# EAGLE board M_C_ext_main_ftdi (EAGLE 9.6.2)
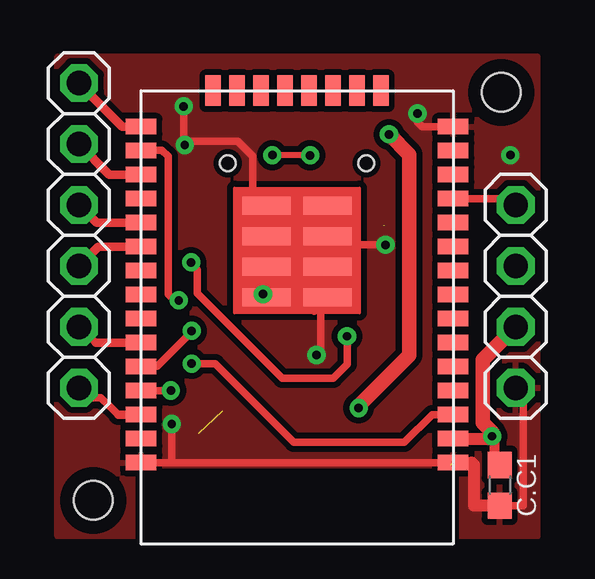
[diagram p0: board, top side]
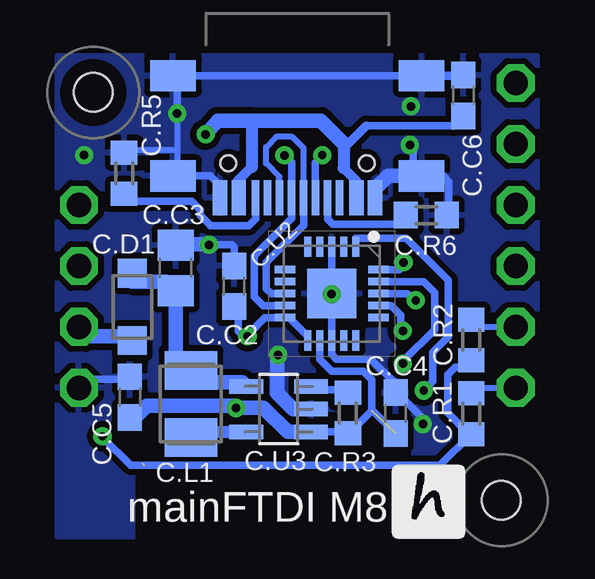
[diagram p1: board, bottom side, seen from below]

No outline drawn. Coordinates in mm, seen from the top.
Copper layers (1*16): Top 0.035mm / dielectric 1.5mm / Bottom 0.035mm
Design rules "default *": minimum track width 10mil, minimum drill 0.35mm, track to track 6mil, track to pad 6mil, pad to pad 6mil, via to via 10mil, smd to smd 10mil, copper to edge 10mil, drill to drill 40mil, minimum pad ring 10mil, minimum via ring 8mil, stop-mask expansion 4mil, vias tented up to drill 4mm, thermal gap 10mil
Holes 1.6 mm at 2,2 19,19
tRestrict: area 18,18 to 20,20; area 1,1 to 3,3
bRestrict: area 1,1 to 3,3; area 18,18 to 20,20

## Footprints (pad centres in the part's own frame; a part is rotated, then mirrored left to right if it is on the bottom)
C0603 = smd 1.1 x 1: 1 -0.85,0; 2 0.85,0
C0805 = smd 1.3 x 1.5: 1 -0.95,0; 2 0.95,0
SHOTKY_2.8 = smd 1.2 x 1.2: A -1.4,0; K 1.4,0
1X06 = drill 1.016 pad 1.575 octagon: 1 -6.35,0; 2 -3.81,0; 3 -1.27,0; 4 1.27,0; 5 3.81,0; 6 6.35,0
L3230M = smd 1.6 x 2.2: 1 -1.4,0; 2 1.4,0
R0603 = smd 1 x 1.1: 1 -0.85,0; 2 0.85,0
TTGO-MICRO-32 = smd 1.27 x 0.635: 3V3 -6.5,5; EN -6.5,4; GND1 -6.5,6; GND2 -6.5,-8; GND3 6.5,6; IO0 6.5,-7; IO2 6.5,-8; IO4 6.5,-6; IO5 6.5,-3; IO12 -6.5,-7; IO14 -6.5,-6; IO16 6.5,-5; IO17 6.5,-4; IO18 6.5,-2; IO19 6.5,-1; IO21 6.5,1; IO22 6.5,4; IO23 6.5,5; IO25 -6.5,-3; IO26 -6.5,-4; IO27 -6.5,-5; IO32 -6.5,-1; IO33 -6.5,-2; IO34 -6.5,1; IO35 -6.5,0; NC 6.5,0; RXD0 6.5,2; TXD0 6.5,3; VN -6.5,2; VP -6.5,3 | smd 0.635 x 1.27: CLK 0.5,-9.5; CMD -0.5,-9.5; IO13 -3.5,-9.5; IO15 3.5,-9.5; SD0 1.5,-9.5; SD1 2.5,-9.5; SD2 -2.5,-9.5; SD3 -1.5,-9.5 | smd 2.032 x 0.762: GND4 -1.27,-0.889; GND5 1.27,-0.889; GND6 -1.27,-2.159; GND7 1.27,-2.159; GND8 -1.27,-3.429; GND9 -1.27,-4.699; GND10 1.27,-3.429; GND11 1.27,-4.699
QFN50P400X400X80-21N = smd 0.85 x 0.3: 1 -1.95,1; 2 -1.95,0.5; 3 -1.95,0; 4 -1.95,-0.5; 5 -1.95,-1; 11 1.95,-1; 12 1.95,-0.5; 13 1.95,0; 14 1.95,0.5; 15 1.95,1 | smd 0.3 x 0.85: 6 -1,-1.95; 7 -0.5,-1.95; 8 0,-1.95; 9 0.5,-1.95; 10 1,-1.95; 16 1,1.95; 17 0.5,1.95; 18 0,1.95; 19 -0.5,1.95; 20 -1,1.95 | smd 2.05 x 2.05: 21 0,0
SOT32-5 = smd 0.6 x 1.4: BP 0.95,1.35; GND 0,-1.35; SHDN 0.95,-1.35; VIN -0.95,-1.35; VOUT -0.95,1.35
1X04 = drill 1.016 pad 1.575 octagon: 1 -3.81,0; 2 -1.27,0; 3 1.27,0; 4 3.81,0
USB-C = smd 0.6 x 1.45: A1B12 -3.235,3.825; A4B9 -2.46,3.825; B1A12 3.215,3.825; B4A9 2.44,3.825 | smd 0.3 x 1.45: A5 -1.26,3.825; A6 -0.26,3.825; A7 0.24,3.825; A8 1.24,3.825; B5 1.74,3.825; B6 0.74,3.825; B7 -0.76,3.825; B8 -1.76,3.825 | smd 1.9 x 1.3: SH1 -5.18,2.91; SH2 -5.18,-1.27; SH3 5.18,-1.27; SH4 5.18,2.91 | hole 0.65: 2.88,2.38; -2.9,2.38

## Placement (x,y rotation side)
C.C1  100n  [C0603]  18.93,2.63 270 top
C.C2  100n  [C0603]  13.13,10.92 90 bottom
C.C3  22u  [C0805]  15.57,11.68 90 bottom
C.C4  100n  [C0603]  6.4,5.64 90 bottom
C.C5  4u7  [C0603]  17.48,6.3 270 bottom
C.C6  10nF  [C0603]  3.58,18.87 270 bottom
C.D1  SHOTKY_2.8  [SHOTKY_2.8]  17.37,10.06 270 bottom
C.J2  [1X06]  1.4,13.04 90 top
C.L1  2u2  [L3230M]  14.93,6.02 90 bottom
C.R1  2k2  [R0603]  3.25,5.61 270 bottom
C.R2  2k2  [R0603]  3.25,8.68 270 bottom
C.R3  100k  [R0603]  8.39,5.64 270 bottom
C.R5  5K1  [R0603]  17.71,15.63 270 bottom
C.R6  5k1  [R0603]  5.13,13.89 180 bottom
C.U1  TTGO-MICRO-32  [TTGO-MICRO-32]  10.49,9.58 180 top
C.U2  FT231XQ-R  [QFN50P400X400X80-21N]  9.07,10.62 270 bottom
C.U3  LM3671_3.3  [SOT32-5]  11.28,5.8 90 bottom
JP1  [1X04]  19.6,10.5 270 top
U$1  USB-C  [USB-C]  10.5,18.43 180 bottom

## Library data of the parts
C.C1-C.C6 = rcl; SPICEPREFIX: C
C.D1 C.U1 U$1 = hugo
C.J2 JP1 = pinhead2
C.L1 = rcl; SPICEPREFIX: L
C.R1-C.R3 C.R5 C.R6 = rcl; SPICEPREFIX: R
C.U2 = FT231XQ-R; DESCRIPTION: FTDI Chip FT231XQ-R, USB Transceiver; HEIGHT: 0.8mm; MANUFACTURER_NAME: FTDI Chip; MANUFACTURER_PART_NUMBER: FT231XQ-R
C.U3 = !stavebnice03

## Nets
GND: C.C1.2 C.C2.2 C.C3.2 C.C4.2 C.C5.1 C.C6.1 C.R5.1 C.R6.1 C.U1.GND1 C.U1.GND2 C.U1.GND3 C.U1.GND4 C.U1.GND5 C.U1.GND6 C.U1.GND7 C.U1.GND8 C.U1.GND9 C.U1.GND10 C.U1.GND11 C.U2.3 C.U2.13 C.U2.21 C.U3.GND JP1.4 U$1.A1B12 U$1.B1A12 U$1.SH1 U$1.SH2 U$1.SH3 U$1.SH4
N$1: C.U2.9 U$1.A7 U$1.B7
N$2: C.U2.8 U$1.A6 U$1.B6
N$3: C.R6.2 U$1.A5
N$4: C.R5.2 U$1.B5
N$6: C.C3.1 C.D1.A C.L1.2 C.U3.BP
N$10: C.L1.1 C.U3.VOUT
N$11: C.R3.1 C.U3.SHDN
N$15: C.C2.1 C.U2.10 C.U2.11 C.U2.20
PA1: C.J2.3 C.U1.IO5
PA2: C.J2.4 C.U1.IO17
PA3: C.J2.5 C.U1.IO4
PA4: C.J2.6 C.U1.IO2
PA5: C.U1.IO27 JP1.1
PROG: C.U1.IO0 C.U2.18
RESET: C.U1.EN C.U2.19
RX/TX: C.U1.TXD0 C.U2.1
SCL: C.J2.1 C.R1.1 C.U1.IO22
SDA: C.J2.2 C.R2.1 C.U1.IO21
TX/RX: C.U1.RXD0 C.U2.17
VCC: C.C1.1 C.D1.K C.R1.2 C.R2.2 C.U1.3V3 JP1.3
VUSB: C.C4.1 C.C5.2 C.C6.2 C.R3.2 C.U2.12 C.U3.VIN U$1.A4B9 U$1.B4A9

## Tracks (layer width: path | path; a pad name or v marks a point on that pad's centre or on a via)
GND  (via drill 0.35)  (1 unrouted)
  Top 0.254: v11.3,8.05 11.48,8.23 | C.U1.GND4 C.U1.GND6 C.U1.GND8 C.U1.GND9 | C.U1.GND11 9.22,13.99 | 9.22,13.99 9.22,13.64 C.U1.GND10 C.U1.GND7 C.U1.GND5 C.U1.GND4 | C.U1.GND4 11.2,9.91 11.2,9.88 | 8.65,14.79 8.65,14.57 9.22,13.99
  Top 0.305: C.U1.GND2 15.72,17.58 15.71,17.57 15.51,17.77 v15.51,18.12 15.51,17.97 | C.U1.GND3 5.36,3.58 | 5.9,16.87 v5.81,16.81 | v5.81,16.81 5.81,17.04 | C.C1.2 19.91,1.78 19.91,6.38 JP1.4 | 16.88,3.46 16.85,3.46 16.78,3.53 | v5.81,16.81 6,16.97 8.01,16.97 8.65,16.33 8.65,14.79 | v11.3,8.05 11.15,8.24 | 11.48,8.23 11.48,10.34 11.2,10.62 | 11.2,9.88 11.2,10.62 | 11.2,10.62 11.2,11.6 | v14.18,12.65 11.76,12.65 10.77,13.64 9.22,13.64 | 5.36,3.58 C.U1.GND1 17.76,3.58 | v5.27,5.18 5.27,3.67 5.36,3.58 | v5.81,16.81 5.77,16.82 v5.77,18.41
  Top 0.508: C.C1.2 17.86,1.78 17.86,3.48 17.76,3.58
  Bottom 0.254: v15.51,18.12 15.51,16.61 | 15.51,16.61 15.51,15.57 U$1.SH4 | C.U3.GND 9.96,5.84 | 4.13,13.64 C.R6.1 | C.R5.1 17.58,16.61 15.51,16.61
  Bottom 0.305: 15.49,18.12 v15.51,18.12 | v5.81,16.81 5.68,16.64 5.68,15.4 | v15.51,18.12 15.51,19.65 U$1.SH3 U$1.SH2 | 15.32,15.52 U$1.SH4 14.12,15.52 13.71,15.11 13.71,15.05 | 5.66,15.28 U$1.SH1 4.42,15.52 4.18,15.28 4.18,13.99 C.R6.1 | 15.56,18.07 v15.51,18.12 | U$1.B1A12 13.71,15.05 | 13.71,15.05 13.73,15.06 | v5.27,5.18 5.27,5.43 6.33,6.49 C.C4.2 6.4,6.86 7.43,7.89 8.87,7.89 9.07,8.09 C.U2.13 v9.07,10.59 C.U2.21 C.U2.3 | 13.49,11.42 C.C2.2 13.13,12.55 13.23,12.65 v14.18,12.65 | 19.24,7.05 17.58,7.05
  Bottom 0.356: C.C6.1 3.6,19.7 U$1.SH2
  Bottom 0.508: C.U3.GND 9.94,5.82
  Bottom 0.61: v11.3,8.05 11.33,8.03 11.33,6.46 10.66,5.8 C.U3.GND | U$1.SH1 6.7,15.52 7.26,14.96 U$1.A1B12 | C.C3.2 15.52,12.68 14.21,12.68 v14.18,12.65 | C.C5.1 17.58,7.05 | 19.24,7.05 JP1.4
  other vias: 19.38,16.38
  pour Top (isolate 0.254): 0.5,0.5 0.5,20.5 20.5,20.5 20.5,0.5
  pour Bottom (isolate 0.254): 0.5,20.5 20.5,20.5 20.5,0.5 0.5,0.5
N$1  (via drill 0.35)
  Top 0.254: v11.03,16.38 v9.46,16.38
  Top 0.305: v11.04,16.38 v11.03,16.38
  Bottom 0.305: C.U2.9 11.92,10.11 12.29,10.49 12.29,12.19 10.73,13.75 U$1.A7 10.74,16.08 v11.04,16.38 | U$1.B7 9.75,16.07 9.46,16.35 v9.46,16.38
N$2
  Bottom 0.254: U$1.A6 10.24,16.68 10.7,17.14 11.38,17.14 11.8,16.72 11.8,16.04 11.25,15.49 11.25,14.61 U$1.B6
  Bottom 0.305: U$1.A6 10.24,13.46 11.79,11.93 11.79,10.83 11.57,10.61 C.U2.8
N$3
  Bottom 0.254: 9.24,13.83 U$1.A5 | C.R6.2 6.3,14.11
  Bottom 0.305: C.R6.2 5.98,13.87 6.36,13.5 9.02,13.5 9.24,13.72 9.24,13.83
N$4  (1 unrouted)
  Bottom 0.254: U$1.B5 12.27,14.58
  Bottom 0.305: U$1.B5 12.23,13.73 12.52,13.44 14.12,13.44 | C.R5.2 17.69,14.78 17.38,14.47 14.89,14.47 14.54,14.12 14.54,13.88 14.12,13.46
N$6
  Bottom 0.61: C.U3.BP 12.79,6.91 14.42,6.91 C.L1.2 15.57,8.06 C.C3.1 15.95,11.11 17.37,11.11 C.D1.A
N$10
  Bottom 0.305: 12.66,4.85 C.U3.VOUT
  Bottom 0.508: C.L1.1 14.69,4.86 12.64,4.86 C.U3.VOUT
N$11
  Bottom 0.305: C.U3.SHDN 9.79,6.62 8.52,6.62 C.R3.1
N$15  (via drill 0.35)
  Top 0.305: v12.57,8.84 12.57,7.67 11.99,7.09 9.87,7.09 6.32,10.64 6.32,11.62 6.08,11.87 v6.08,11.91
  Bottom 0.305: v6.08,11.91 6.08,11.79 6.25,11.62 C.U2.20 | C.U2.11 10.07,8.85 10.84,9.62 C.U2.10 11.85,9.62 12.57,8.89 v12.57,8.84 12.75,8.84 12.95,9.04 12.95,9.89 C.C2.1
PA1
  Top 0.356: C.U1.IO5 2.21,12.58 C.J2.3
PA2
  Top 0.356: C.U1.IO17 2.13,13.58 C.J2.4
PA3
  Top 0.356: C.U1.IO4 2.67,15.58 C.J2.5
PA4
  Top 0.356: C.U1.IO2 3.21,17.58 C.J2.6
PA5
  Top 0.305: JP1.1 19.35,14.56 17,14.56
  Top 0.356: 17,14.56 C.U1.IO27
PROG  (via drill 0.35)
  Top 0.305: 4.32,16.58 4.33,16.59 4.86,16.59 5.12,16.33 5.12,10.59 5.38,10.34 v5.56,10.34
  Top 0.356: C.U1.IO0 4.32,16.58
  Bottom 0.305: v5.56,10.34 5.64,10.34 5.92,10.61 C.U2.18
RESET  (via drill 0.35)
  Top 0.305: v6.1,7.7 7.08,7.7 10.36,4.42 14.95,4.42 16.11,5.58 C.U1.EN
  Bottom 0.305: C.U2.19 5.24,11.12 4.78,10.66 4.78,9.12 6.1,7.8 v6.1,7.7
RX/TX  (via drill 0.35)
  Top 0.305: 5.21,6.56 v5.23,6.58 C.U1.TXD0
  Bottom 0.254: 5.23,6.69 v5.23,6.58
  Bottom 0.305: C.U2.1 8.07,12.93 5.97,12.93 4.21,11.17 4.21,8.82 4.85,8.18 4.85,6.96 v5.23,6.58
SCL
  Top 0.305: 3.04,5.58 2.69,5.93 2.31,6.28 1.81,6.28 C.J2.1
  Top 0.356: 3.04,5.58 C.U1.IO22
  Bottom 0.254: C.R1.1 3.02,6.69 C.J2.1
SDA
  Top 0.305: 2.1,8.58 C.J2.2 | C.U1.IO21
  Top 0.356: C.U1.IO21 2.1,8.58
  Bottom 0.254: C.R2.1 3.25,9.23 C.J2.2
TX/RX  (via drill 0.35)
  Top 0.305: v6.1,9.06 6.1,9.02 4.66,7.58 C.U1.RXD0
  Bottom 0.305: C.U2.17 6.59,10.12 6.2,9.72 6.2,9.16 v6.1,9.06
VCC  (via drill 0.35)
  Top 0.406: 17,4.56 C.U1.3V3 | 18.6,4.67 v18.62,4.67 v18.62,4.66 18.7,4.57 18.7,3.71 C.C1.1
  Top 0.508: C.U1.3V3 18.61,4.58 18.63,4.59 v18.63,4.66 v18.62,4.67
  Top 0.61: v18.62,4.67 18.62,4.85 18.24,5.23 18.24,7.87 JP1.3
  Bottom 0.254: 3.42,4.43 C.R1.2 | 3.45,7.82 C.R2.2
  Bottom 0.305: C.R1.2 3.48,4.99 | C.R2.2 3.53,7.55 3.93,7.55 4.24,7.24 4.24,5.64 3.35,4.76 C.R1.2 | C.R1.2 4.56,3.46 17.44,3.46 18.62,4.63 v18.62,4.67 | JP1.3 19.21,8.84 | 17.55,8.84 C.D1.K
  Bottom 0.508: 18.71,4.58 v18.62,4.67
  Bottom 0.61: 19.21,8.84 17.55,8.84
VUSB  (via drill 0.35)  (1 unrouted)
  Top 0.61: v13.06,5.85 13.06,5.95 15.16,8.05 15.16,16.41 v14.32,17.25 14.34,17.29
  Bottom 0.254: 9.86,4.92 C.U3.VIN
  Bottom 0.305: C.C4.1 7.39,5.78 7.39,7.02 7.75,7.38 9.07,7.38 9.57,7.89 C.U2.12 | 9.77,4.7 C.U3.VIN 8.45,4.85 C.R3.2 8.26,4.92 8.22,4.92 7.39,5.74 | U$1.B4A9 12.94,14.87 12.97,14.9 12.97,15.32 | 7.62,17.6 4,17.6 | 8.06,15.33 8.06,14.62 U$1.A4B9
  Bottom 0.356: C.C6.2 4,17.6 | 7.62,17.6 8.47,16.75 8.53,16.82 8.81,17.09 8.81,17.12
  Bottom 0.406: 12.97,15.32 12.39,15.9 | 8.57,15.84 8.06,15.33
  Bottom 0.508: 12.39,17.82 12.39,15.9 | 8.53,16.82 8.57,16.78 8.57,15.84
  Bottom 0.61: C.U3.VIN 10.9,4.85 11.91,5.86 13.04,5.86 v13.06,5.85 13.16,5.95 16.78,5.95 17.32,5.41 17.44,5.41 C.C5.2 | v14.32,17.25 13.82,17.82 12.39,17.82 9.52,17.82 8.81,17.12 8.53,16.84

## Text on the board
bPlace: mainFTDI M8